# Altium PCB v5-IRarray.pcbdoc
Units mm, origin at the board's own origin, x right, y up, seen from the top; angles counter-clockwise.
Board outline 81.01 x 98.47 mm, 2 copper layers (Top Layer, Bottom Layer); 43 components, 34 nets, 88 pads, 0 vias.
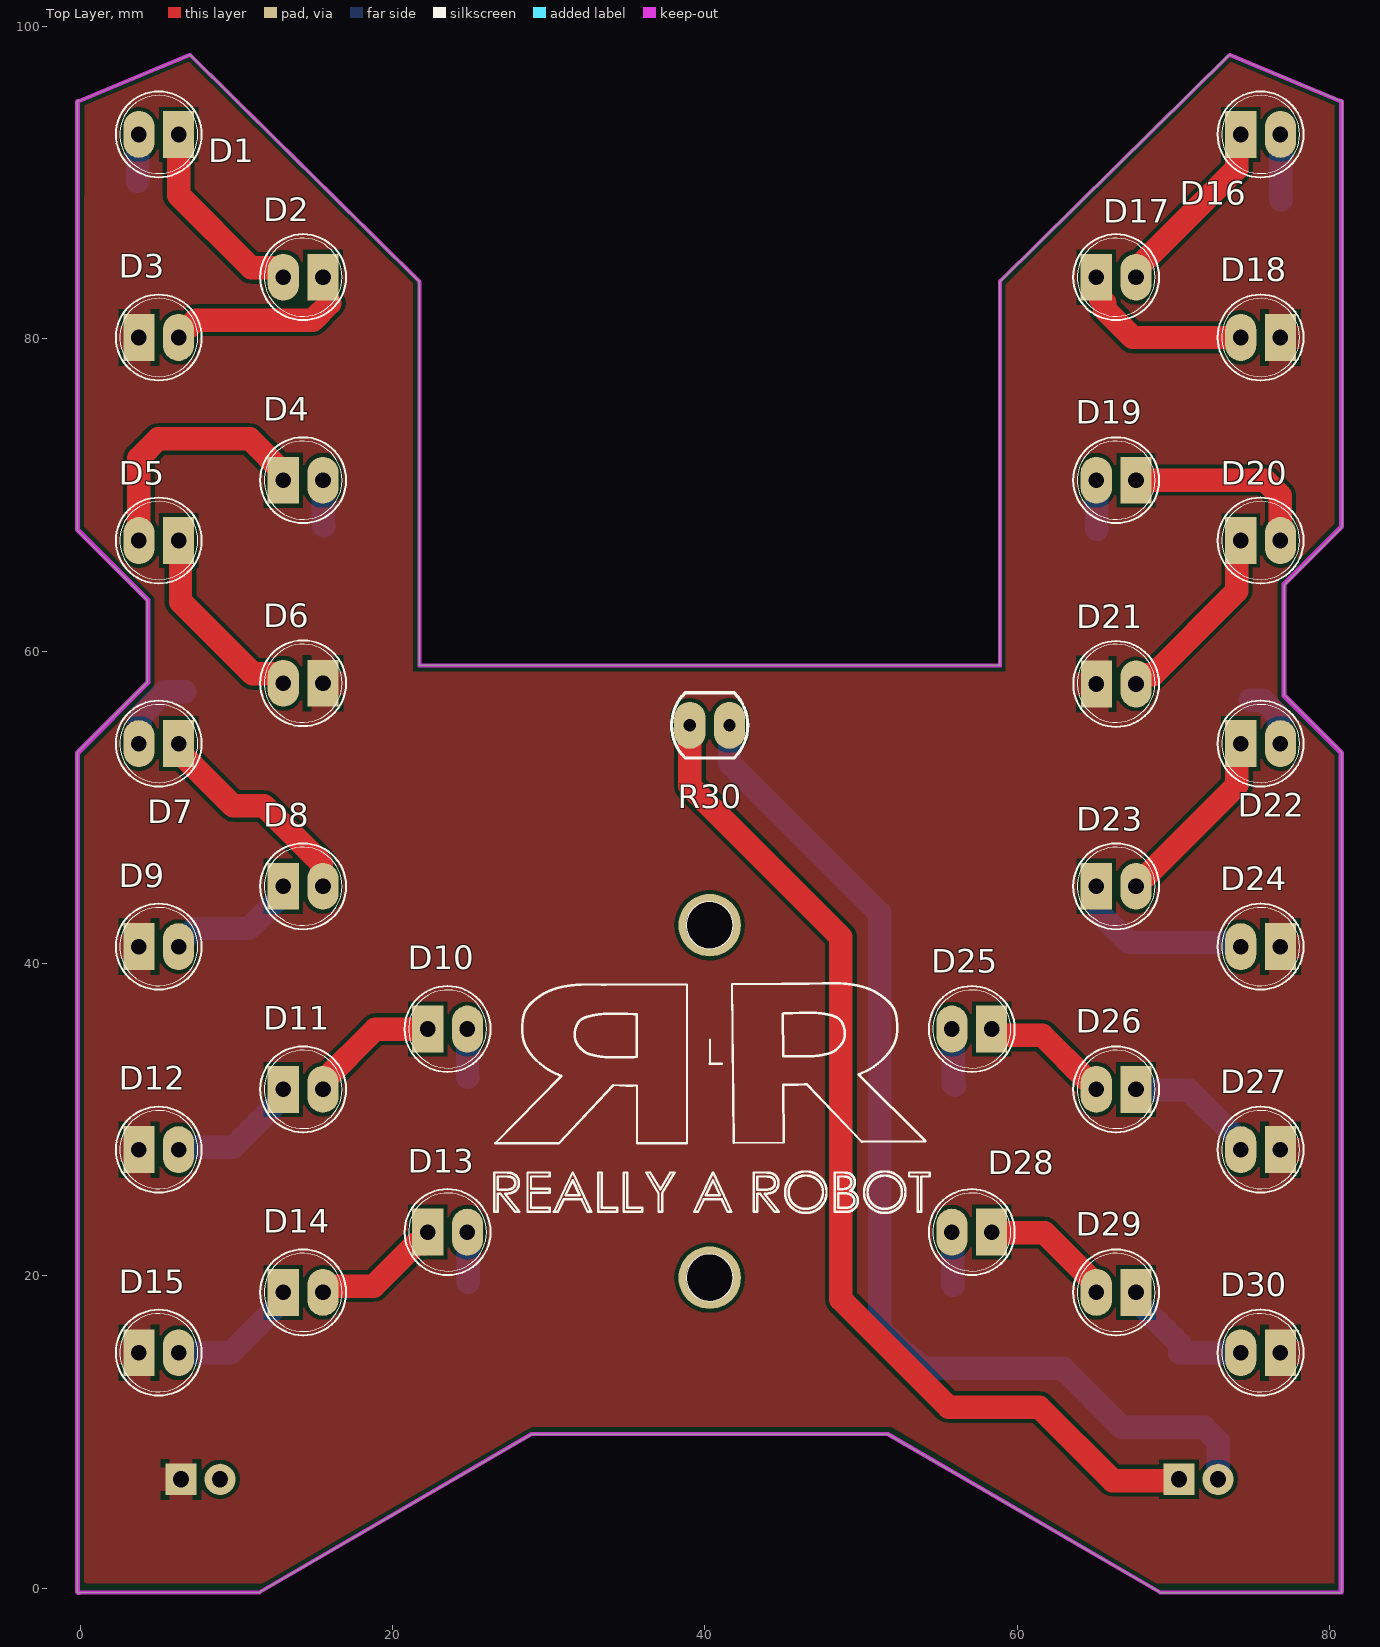
[diagram p0: Top Layer view]
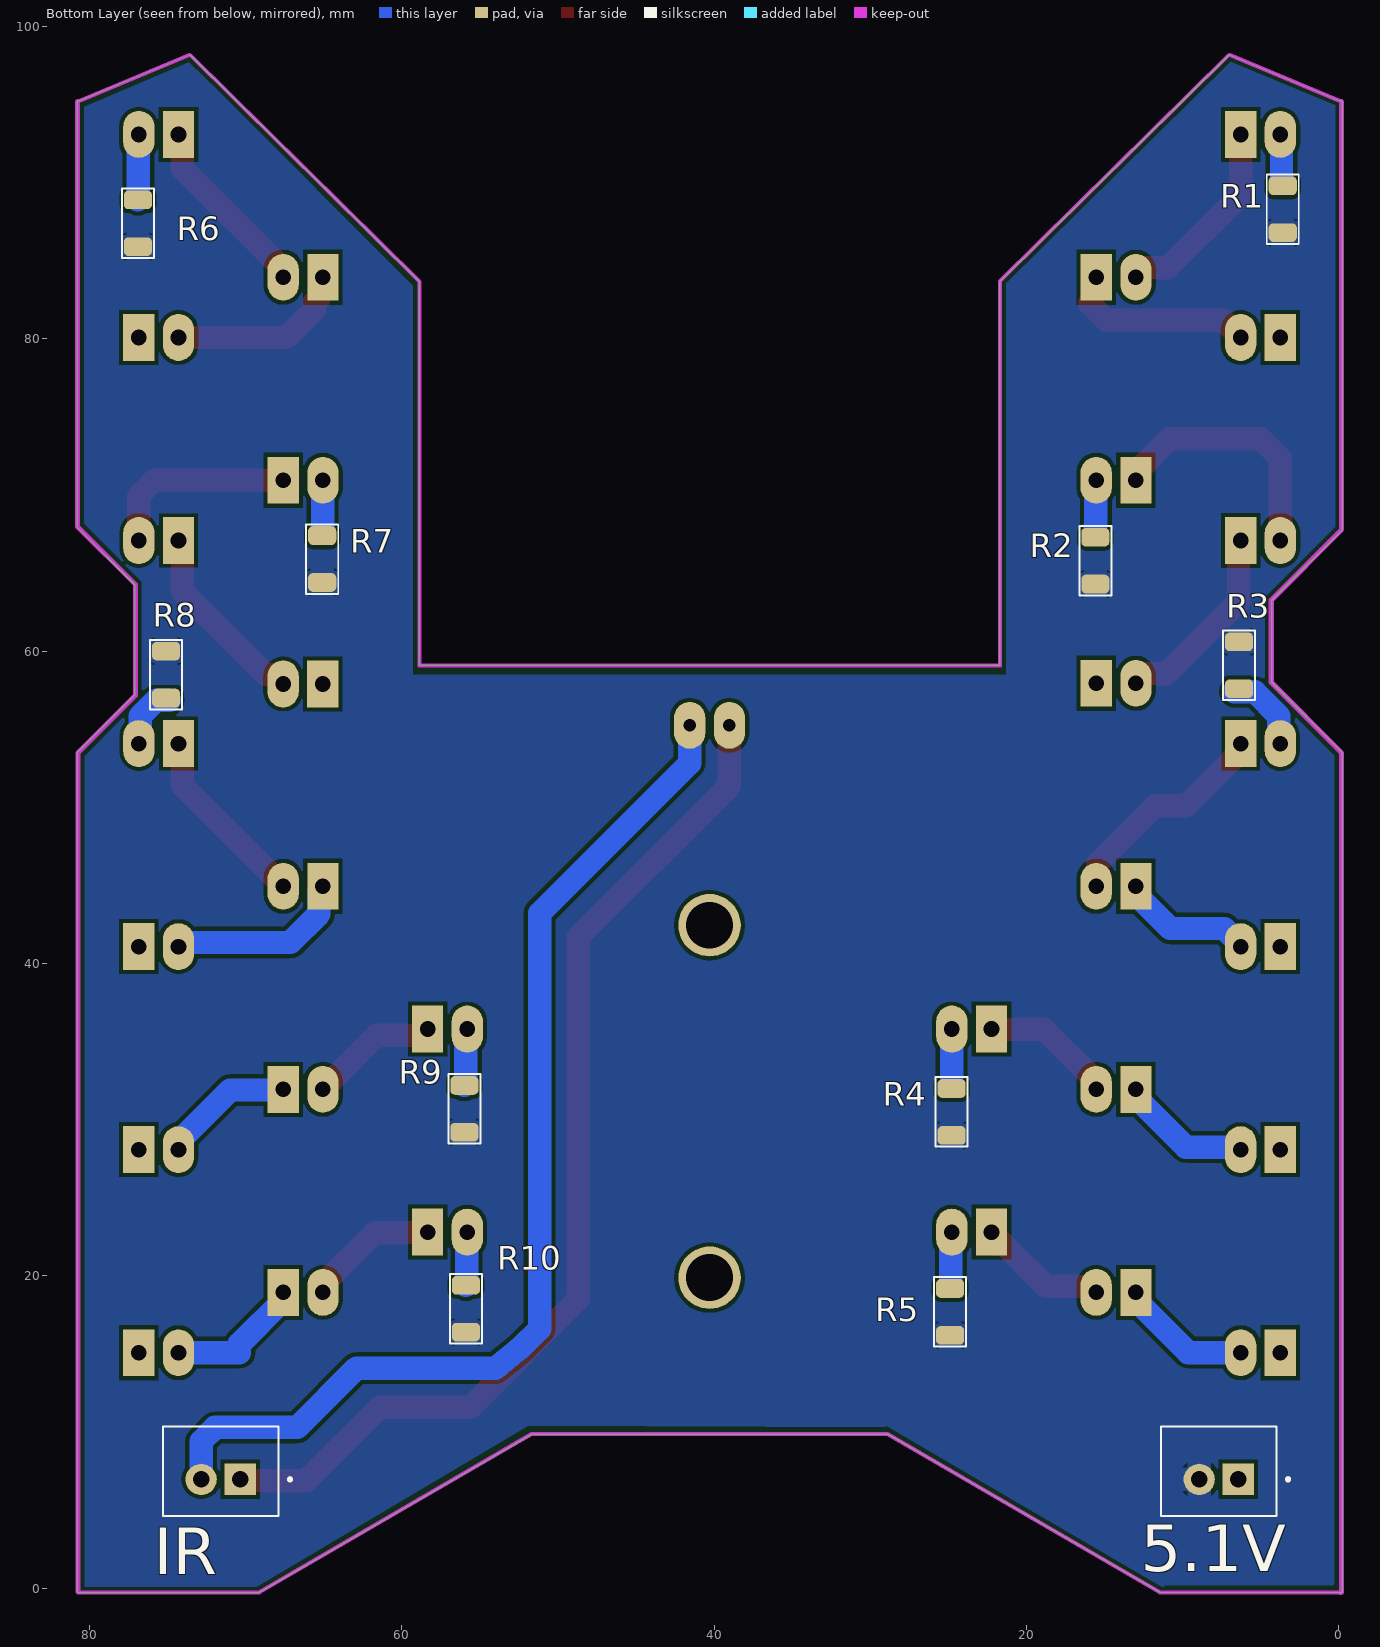
[diagram p1: Bottom Layer view, seen from below]
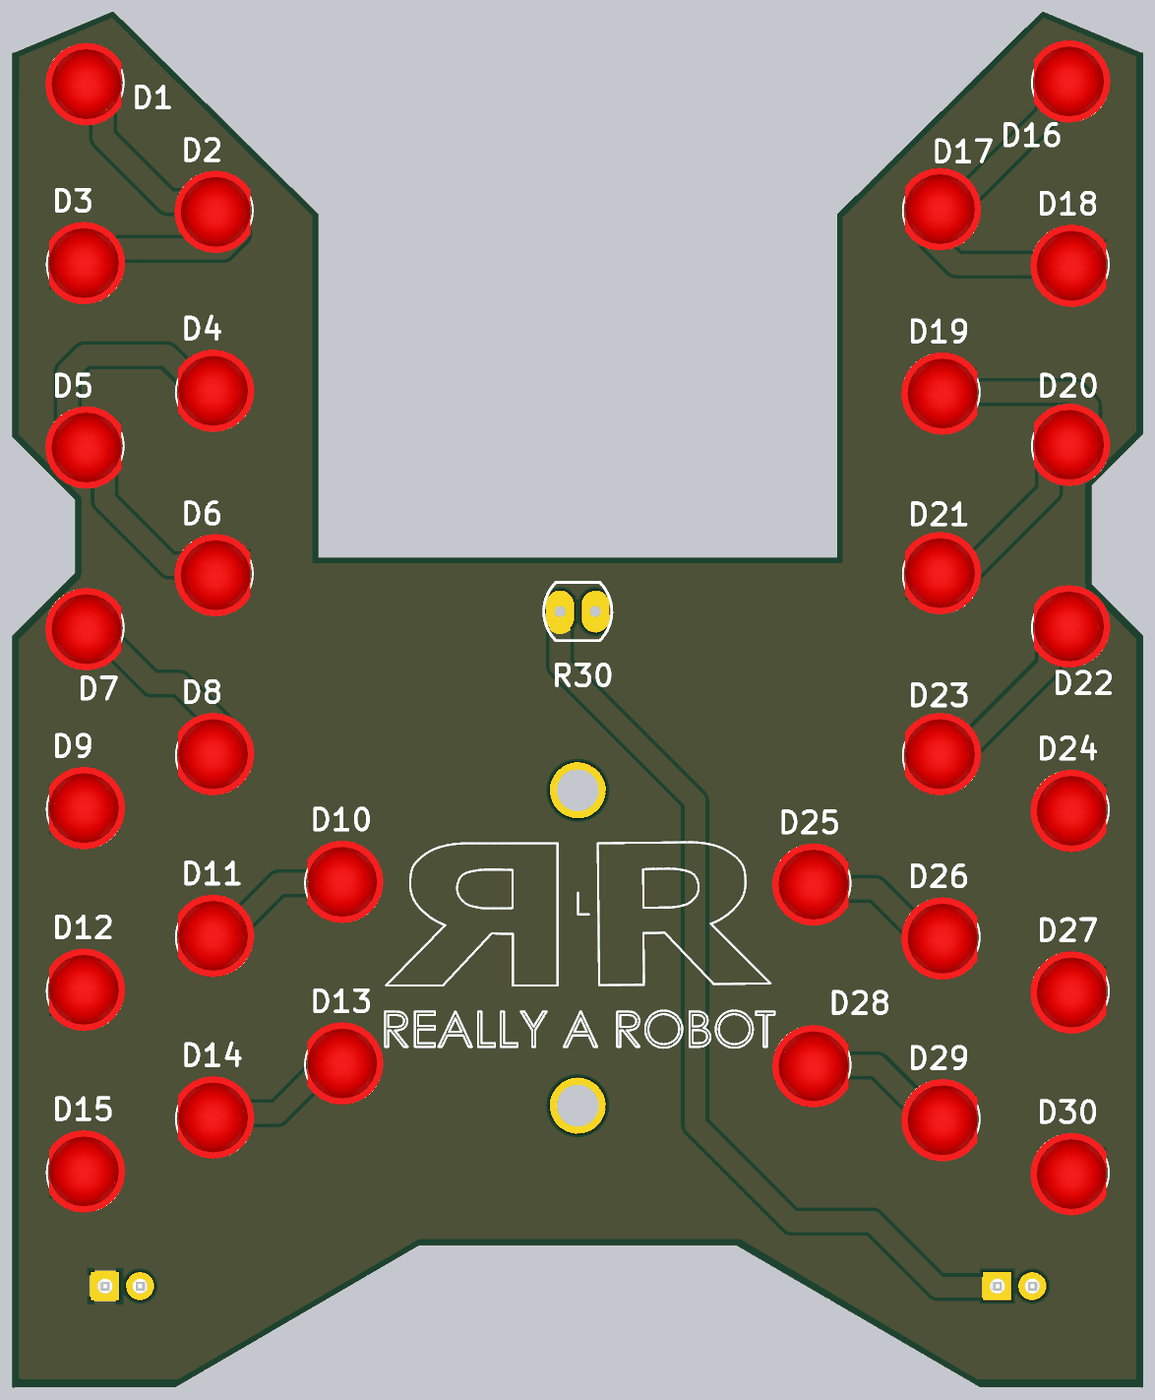
[diagram p2: 3D render of the assembled board from above, using the file's embedded part models]
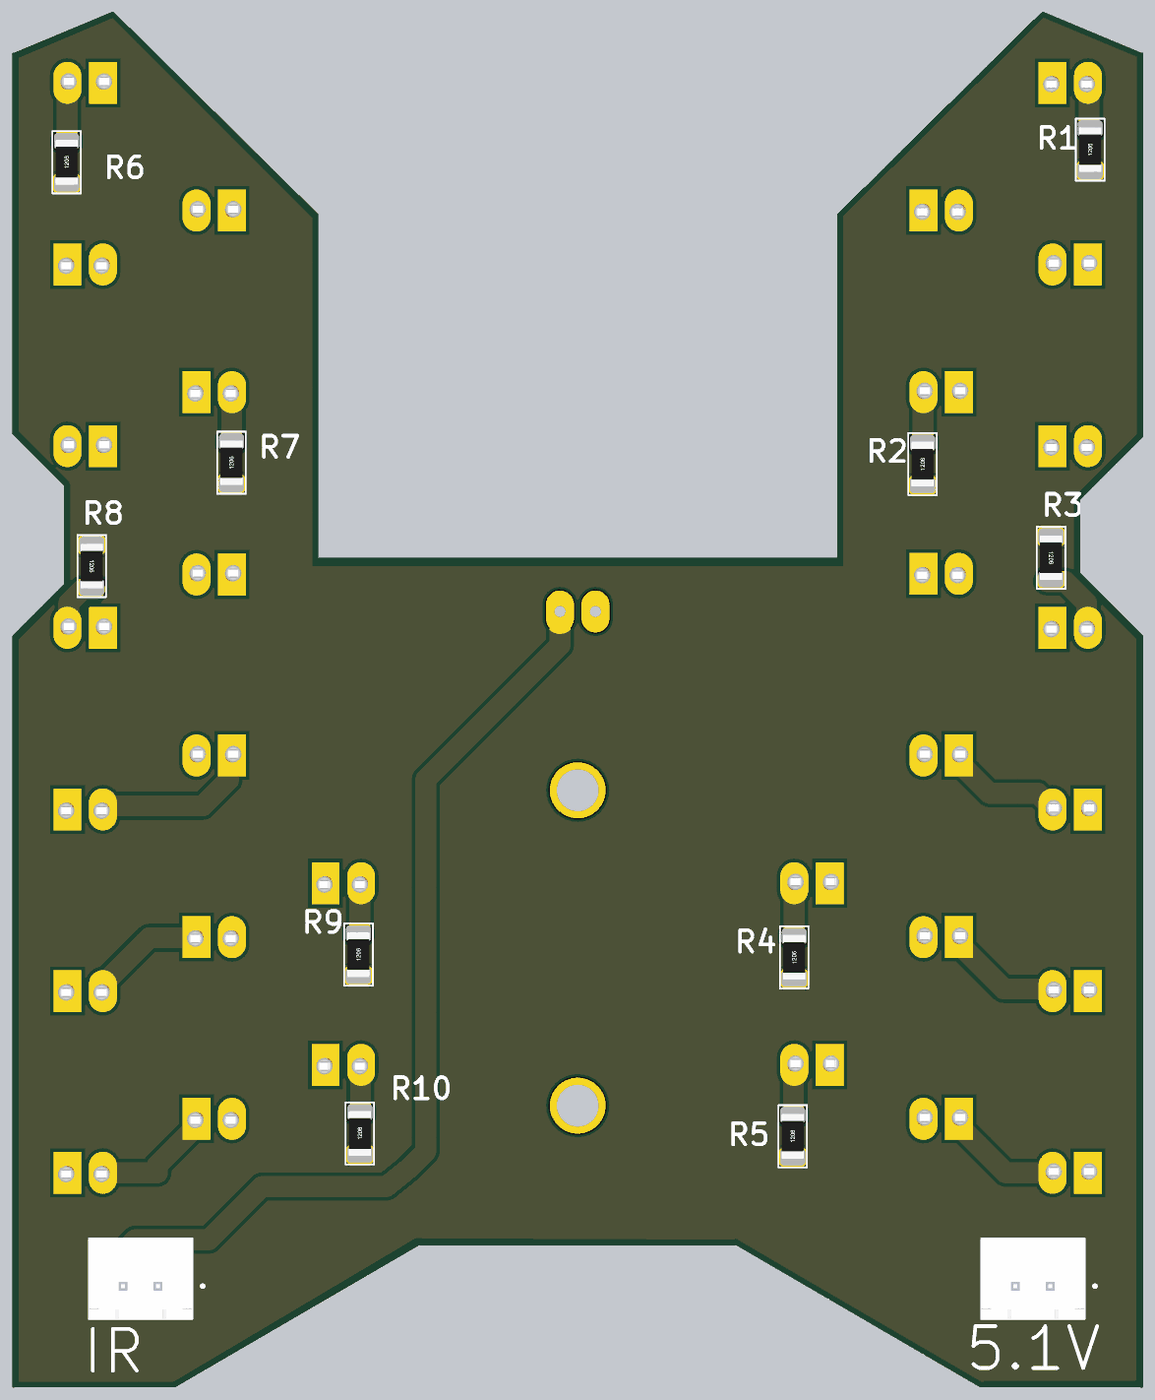
[diagram p3: 3D render of the assembled board from below, using the file's embedded part models]

## Layer stack, top to bottom
Top Solder: solder mask 0.0102, Solder Resist, Dk 3.5
Top Layer: signal copper 0.0356
Dielectric1: dielectric 0.32, FR-4, Dk 4.8
Bottom Layer: signal copper 0.0356
Bottom Solder: solder mask 0.0102, Solder Resist, Dk 3.5

## Board outline
-0.2,-0.2 ccw(c-0.1,-0.2) -0.023,-0.264 11.437,-0.271 11.473,-0.261 28.891,9.871 51.709,9.871 69.127,-0.261 69.163,-0.271 80.628,-0.271 ccw(c80.676,-0.182) 80.776,-0.182 80.776,53.476 80.747,53.547 77.1,57.193 77.1,64.258 80.771,67.929 80.8,68 80.8,95.141 ccw(c80.7,95.141) 80.657,95.232 73.616,98.172 73.538,98.157 58.904,83.692 58.883,83.642 58.883,59.087 21.717,59.087 21.717,83.642 21.696,83.692 7.062,98.157 6.984,98.172 -0.065,95.228 ccw(c-0.107,95.137) -0.207,95.137 -0.207,67.807 -0.178,67.736 4.3,63.258 4.3,58.017 -0.171,53.547 -0.2,53.476

## Design rules (kind name [scope] priority, off if disabled: settings)
Clearance [All] p1: gap=0.25 ignorepadtopadclearanceinfootprint=TRUE
ComponentClearance [All] p1: gap=0.25 collisioncheckmode=3 verticalgap=0.01 showdistances=FALSE
DiffPairsRouting [All] p1: maxlimit=2.54 minlimit=0.127 mostfreqgap=0.254 toplayer_minwidth=0.508 toplayer_maxwidth=2.54 toplayer_prefwidth=0.508 bottomlayer_minwidth=0.508 bottomlayer_maxwidth=2.54 bottomlayer_prefwidth=0.508 maxuncoupledlength=12.7
HoleSize [All] p1: absolutevalues=TRUE maxlimit=4 minlimit=0.3 maxpercent=80.000 minpercent=20.000
MinimumSolderMaskSliver [All] p1: minsoldermaskwidth=0.075
PlaneConnect [All] p1: planeconnectstyle=Relief reliefexpansion=0.254 reliefentries=4 reliefconductorwidth=1.524 reliefairgap=0.508
PolygonConnect [All] p1: connectstyle=Relief reliefconductorwidth=1.524 reliefentries=4 polygonreliefangle="90 Angle" airgapwidth=0.3
RoutingVias [All] p1: holewidth=0.711 width=1.27 viastyle="Through Hole" minholewidth=0.711 minwidth=1.27 maxholewidth=0.711 maxwidth=1.27
SilkToSilkClearance [All] p1: silktosilkclearance=0.1
SilkToSolderMaskClearance [IsPad] p1: minsilkscreentomaskgap=0.1 clearancetoexposedcopper=TRUE
SolderMaskExpansion [All] p1: expansion=0.1
Width Width_PWR [All] p1: maxlimit=5 minlimit=0.3 preferedwidth=0.5
23 further rules are at their usual default settings.

## Components (designator, comment, footprint, x,y, rotation, side; value= is the part's Value field where it differs from the comment)
5.1V "B2B-XH-A(LF)(SN)" JST_B2B-XH-A(LF)(SN) 7.7,7.5 r180 bottom
D1 "SFH4547" SFH45547 5.027,93.086 r180 top
D2 "SFH4547" SFH45547 14.272,83.947 r180 top
D3 "SFH4547" SFH45547 5.027,80.086 r0 top
D4 "SFH4547" SFH45547 14.272,70.947 r0 top
D5 "SFH4547" SFH45547 5.027,67.086 r180 top
D6 "SFH4547" SFH45547 14.272,57.947 r180 top
D7 "SFH4547" SFH45547 5.027,54.086 r180 top
D8 "SFH4547" SFH45547 14.272,44.947 r0 top
D9 "SFH4547" SFH45547 5.027,41.086 r0 top
D10 "SFH4547" SFH45547 23.518,35.808 r0 top
D11 "SFH4547" SFH45547 14.272,31.947 r0 top
D12 "SFH4547" SFH45547 5.027,28.086 r0 top
D13 "SFH4547" SFH45547 23.518,22.808 r0 top
D14 "SFH4547" SFH45547 14.272,18.947 r0 top
D15 "SFH4547" SFH45547 5.027,15.086 r0 top
D16 "SFH4547" SFH45547 75.573,93.086 r0 top
D17 "SFH4547" SFH45547 66.328,83.947 r0 top
D18 "SFH4547" SFH45547 75.573,80.086 r180 top
D19 "SFH4547" SFH45547 66.328,70.947 r180 top
D20 "SFH4547" SFH45547 75.573,67.086 r0 top
D21 "SFH4547" SFH45547 66.33,57.9 r0 top
D22 "SFH4547" SFH45547 75.573,54.086 r0 top
D23 "SFH4547" SFH45547 66.328,44.947 r0 top
D24 "SFH4547" SFH45547 75.573,41.086 r180 top
D25 "SFH4547" SFH45547 57.082,35.808 r180 top
D26 "SFH4547" SFH45547 66.328,31.947 r180 top
D27 "SFH4547" SFH45547 75.573,28.086 r180 top
D28 "SFH4547" SFH45547 57.082,22.808 r180 top
D29 "SFH4547" SFH45547 66.328,18.947 r180 top
D30 "SFH4547" SFH45547 75.573,15.086 r180 top
IR "B2B-XH-A(LF)(SN)" JST_B2B-XH-A(LF)(SN) 71.6,7.5 r180 bottom
R1 "21 5% 1/4W" R1206 3.6,88.3 r90 bottom
R2 "21 5% 1/4W" R1206 15.6,65.8 r90 bottom
R3 "21 5% 1/4W" R1206 6.4,59.1 r270 bottom
R4 "21 5% 1/4W" R1206 24.8,30.5 r90 bottom
R5 "21 5% 1/4W" R1206 24.9,17.7 r90 bottom
R6 "21 5% 1/4W" R1206 76.9,87.4 r90 bottom
R7 "21 5% 1/4W" R1206 65.1,65.9 r90 bottom
R8 "21 5% 1/4W" R1206 75.1,58.5 r270 bottom
R9 "21 5% 1/4W" R1206 56,30.7 r90 bottom
R10 "21 5% 1/4W" R1206 55.9,17.9 r90 bottom
R30 "VT90N1" EXCE-VT90N1 40.3,55.252 r0 top

## Footprints (in the part's own frame and the unit in brackets; to place one, negate y for a bottom-side part, rotate by r counter-clockwise, add the part's x,y. Pads: shape width x height; smd on the part's side, far side on the other; paste and mask are expansions set on the pad)
EXCE-VT90N1 [mm] "THD, 2-Leads, Body Width 4.17mm (Max), Height 2.29mm"
  oval 2x3 hole 0.8: 1(-1.27,0) 2(1.27,0)
  silkscreen extent -2.44,-2.08 2.44,2.08, body extent -2.44,-2.09 2.44,2.09, height 2.29
JST_B2B-XH-A(LF)(SN) [mm]
  rect 2x2 hole 1.05: 1(1.25,-0.525)
  round 2 hole 1.05: 2(-1.25,-0.525)
  silkscreen extent -3.7,-2.88 4.54,2.88, body extent -3.7,-2.88 3.7,2.88, height 7
R1206 [mm]
  rrect50% 1.2x1.8 smd: 1(-1.5,0) 2(1.5,0)
  silkscreen extent -2.22,-1.02 2.22,1.02, body extent -1.6,-0.8 1.6,0.8, height 0.6
SFH45547 [mm]
  oval 2x3 hole 1 mask+0: A(1.27,0)
  rect 2x3 hole 1 mask+0: C(-1.27,0)
  silkscreen extent -2.75,-2.75 2.75,2.75, body extent -2.59,-2.85 2.84,3.05, height 8.58

## Part data
5.1V IR: "Connector Header Through Hole 2 position 0.098 (2.50mm)", Package=None, Check_prices=https://www.snapeda.com/parts/B2B-XH-A(LF)(SN)/JST+Sales+America+Inc./view-part/?ref=eda, MF="JST Sales America Inc.", MP=B2B-XH-A(LF)(SN), SnapEDA_Link=https://www.snapeda.com/parts/B2B-XH-A(LF)(SN)/JST+Sales+America+Inc./view-part/?ref=snap
R1 R2 R3 R4 R5 R6 R7 R8 R9 R10: library part R-1206, "SMD 1206 0.25W 5% 200V", Type=RES
R30: library part CMP-2000-07406-1, "Photoconductive Resistor, 200 kOhm, 100 V, 80 mW, -40 to 75 degC, 2-Pin THD, RoHS", Dark Resistance=200kohm, Manufacturer="Excelitas Technology", Operating Temperature Max=75癈, Operating Temperature Min=-40癈, Package Description="2-Pin Through Hole Device, Body Width 4.17 mm (Max), Height 2.29 mm", Power Rating=80mW, Resistance @ Lux=12kohm, Resistor Case Style=-, Voltage Rating=100V, Datasheet URL=http://datasheet.octopart.com/VT90N1-Excelitas-datasheet-10388451.pdf, Datasheet Version=09/2006, Manufacturer URL=http://www.excelitas.com/Pages/Index.aspx, Mounting Technology=ThroughHole, Package Reference=VT90N1, Packaging=Each, Product Range=-, SVHC=Cadmiumchloride(15-Jun-2015)

## Free pads (board coordinates)
  round 4 hole 3: 50(40.3,42.456) 51(40.3,19.889)

## Nets (pads, with @x,y where several pads share a name; then routed paths per layer and width w, separated by ;. In a path a pad name is that pad's centre, name@x,y a point inside that pad or via, vN(x,y) a via of type N, cw(c..) or ccw(c..) an arc to the next point about the centre after c; other vN are vias at no path point)
5V: 5.1V.2 R1.1 R2.1 R3.1 R4.1 R5.1 R6.1 R7.1 R8.1 R9.1 R10.1
A1-LDR: IR.1 R30.1 | length 67.3
  Top Layer w1.5: R30.1 39.03,51.37 48.7,41.7 48.7,18.5 55.6,11.6 61.4,11.6 66.1,6.9 IR.1@70.4,6.9
GND: 5.1V.1 D3.C D6.C D9.C D12.C D15.C D18.C D21.C D24.C D27.C D30.C
NetD1_A: D1.A R1.2 | length 3
  Bottom Layer w1.5: R1.2@3.678,90.1 3.678,93.007 D1.A
NetD1_C: D1.C D2.A | length 13
  Top Layer w1.5: D1.C 6.297,89.203 10.957,84.543 12.771,84.543 13.002,84.312 D2.A
NetD2_C: D2.C D3.A | length 10.7
  Top Layer w1.5: D3.A 6.297,80.315 6.759,80.777 6.988,80.777 7.411,81.2 10.2,81.2 14.9,81.2 15.982,82.282
NetD4_A: D4.A R2.2 | length 2.9
  Bottom Layer w1.5: D4.A 15.571,70.918 15.571,68.054 15.6,68.025
NetD4_C: D4.C D5.A | length 16.4
  Top Layer w1.5: D5.A 3.757,72.357 5,73.6 10.85,73.6 13.002,71.447 D4.C
NetD5_C: D5.C D6.A | length 12.9
  Top Layer w1.5: D5.C 6.421,66.961 6.421,63.179 11.057,58.543 12.771,58.543 13.002,58.312 D6.A
NetD7_A: D7.A R3.2 | length 5.3
  Bottom Layer w1.5: D7.A 3.852,54.181 3.852,55.852 5.4,57.4 R3.2@6.7,57.4
NetD7_C: D7.C D8.A | length 14.1
  Top Layer w1.5: D7.C 6.297,53.586 9.784,50.099 11.765,50.099 15.447,46.417 15.447,45.043 D8.A
NetD8_C: D8.C D9.A | length 8.1
  Bottom Layer w1.5: D9.A@6.6,41.5 7.345,42.245 10.8,42.245 13.002,44.447 D8.C
NetD10_A: D10.A R4.2 | length 3.1
  Bottom Layer w1.5: D10.A 24.794,35.802 24.794,32.731 24.8,32.725
NetD10_C: D10.C D11.A | length 8.6
  Top Layer w1.5: D11.A 15.542,32.447 18.895,35.8 22.24,35.8 D10.C
NetD11_C: D11.C D12.A | length 8.6
  Bottom Layer w1.5: D12.A 6.456,28.245 9.8,28.245 13.002,31.447 D11.C
NetD13_A: D13.A R5.2 | length 3.2
  Bottom Layer w1.5: D13.A 24.844,22.752 R5.2@24.844,19.6
NetD13_C: D13.C D14.A | length 8.7
  Top Layer w1.5: D14.A 15.542,19.122 15.773,19.353 18.792,19.353 21.498,22.058 21.998,22.058 22.248,22.308 D13.C
NetD14_C: D14.C D15.A | length 8.6
  Bottom Layer w1.5: D15.A 9.641,15.086 13.002,18.447 D14.C
NetD16_A: D16.A R6.2 | length 4.2
  Bottom Layer w1.5: D16.A 76.872,93.057 76.872,88.928 R6.2
NetD16_C: D16.C D17.A | length 11.9
  Top Layer w1.5: D17.A 67.598,84.447 74.053,90.903 74.053,92.836 D16.C
NetD17_C: D17.C D18.A | length 11.7
  Top Layer w1.5: D17.C 65.058,83.447 65.308,83.197 65.308,82.608 65.598,82.318 65.598,81.879 67.39,80.086 D18.A
NetD19_A: D19.A R7.2 | length 3.2
  Bottom Layer w1.5: D19.A 65.079,70.926 65.079,67.821 R7.2@65.1,67.8
NetD19_C: D19.C D20.A | length 12.5
  Top Layer w1.5: D19.C 75.853,70.947 76.843,69.957 D20.A
NetD20_C: D20.C D21.A | length 12.5
  Top Layer w1.5: D21.A 67.6,58.265 67.831,58.496 68.696,58.496 74.053,63.853 74.053,66.836 D20.C
NetD22_A: D22.A R8.2 | length 4.1
  Bottom Layer w1.5: R8.2@74.9,56.852 75.743,56.852 76.748,55.848 76.748,54.817 76.843,54.721 D22.A
NetD22_C: D22.C D23.A | length 12.1
  Top Layer w1.5: D23.A 67.598,45.312 67.829,45.543 68.193,45.543 74.053,51.403 74.053,53.836 D22.C
NetD23_C: D23.C D24.A | length 11.8
  Bottom Layer w1.5: D23.C 65.308,44.697 65.308,43.179 67.14,41.347 74.072,41.347 74.303,41.116 D24.A
NetD25_A: D25.A R9.2 | length 3.7
  Bottom Layer w1.5: D25.A 55.906,35.714 55.906,32.294 R9.2
NetD25_C: D25.C D26.A | length 8.6
  Top Layer w1.5: D25.C 58.352,35.653 58.602,35.403 61.602,35.403 64.462,32.543 64.827,32.543 65.058,32.312 D26.A
NetD26_C: D26.C D27.A | length 8.6
  Bottom Layer w1.5: D26.C 67.638,31.906 70.983,31.906 74.303,28.586 D27.A
NetD28_A: D28.A R10.2 | length 3.4
  Bottom Layer w1.5: D28.A 55.856,22.764 55.856,19.444 R10.2
NetD28_C: D28.C D29.A | length 8.6
  Top Layer w1.5: D28.C 58.393,22.768 61.737,22.768 65.058,19.447 D29.A
NetD29_C: D29.C D30.A | length 8.9
  Bottom Layer w1.5: D29.C 67.598,18.447 70.4,15.645 70.4,15.086 D30.A
NetIR_2: IR.2 R30.2 | length 69.7
  Bottom Layer w1.5: R30.2 41.57,52.83 51.18,43.22 51.18,16.62 52.421,15.38 52.483,15.33 54.006,14.1 62.9,14.1 66.7,10.3 71.971,10.3 72.85,9.421 IR.2@72.85,6.9

## Polygon pours and split planes (outlines as drawn)
GND on Top Layer "NONET_L-01_P-001" (solid, pour order 1): 0.1,0.5 0.1,53.1 4.7,57.7 4.7,63.5 0.2,68 0.286,94.777 0.286,95 0.225,94.939 7.062,97.8 21.3,83.562 21.3,58.7 59.27,58.7 59.206,83.39 73.616,97.8 80.3,95 80.3,68.148 76.7,64.548 76.7,56.9 80.3,53.3 80.3,0.314 68.877,0.314 51.932,10.35 28.972,10.35 11.738,0.314 0.286,0.314
5V on Bottom Layer "NONET_L-01_P-001" (solid, pour order 0): 0.2,0.2 0.3,0.3 0.3,53.3 4.7,57.7 4.7,63.5 0.2,68 0.2,94.8 0.2,94.963 7.062,97.8 21.3,83.562 21.3,83.2 21.3,58.5 59.3,58.5 59.3,83.4 73.616,97.716 80.5,94.8 80.5,94.7 80.5,68.2 76.7,64.4 76.7,56.9 80.4,53.2 80.4,0.1 69.3,0.1 51.917,10.4 29.1,10.3 29,10.4 11.2,-0.033 11.2,0.2

## Keep-outs
Keep-Out Layer:
  lines w0.127: -0.107,-0.2 11.437,-0.207 11.441,-0.206 28.873,9.935 51.727,9.935 69.159,-0.206 69.163,-0.207 80.7,-0.207 80.707,-0.2 ; -0.107,95.137 -0.102,95.143 7.009,98.113 7.017,98.112 21.652,83.647 21.654,83.642 21.654,59.023 58.946,59.023 58.946,83.642 58.948,83.647 73.583,98.112 73.591,98.113 80.702,95.143 80.707,95.137
  lines w0.2: -0.107,95.137 -0.107,67.807 4.4,63.3 4.4,57.976 -0.1,53.476 -0.1,-0.2 ; 80.676,-0.182 80.676,53.476 77,57.151 77,64.3 80.7,68 80.7,95.141
  lines w0.254: -0.207,67.807 -0.178,67.736 4.3,63.258 4.3,58.017 -0.171,53.547 -0.2,53.476 -0.2,-0.2 ccw(c-0.1,-0.2) -0.023,-0.264 11.437,-0.271 11.473,-0.261 28.891,9.871 51.709,9.871 69.127,-0.261 69.163,-0.271 80.628,-0.271 ccw(c80.676,-0.182) 80.776,-0.182 80.776,53.476 80.747,53.547 77.1,57.193 77.1,64.258 80.771,67.929 80.8,68 80.8,95.141 ccw(c80.7,95.141) 80.657,95.232 73.616,98.172 73.538,98.157 58.904,83.692 58.883,83.642 58.883,59.087 21.717,59.087 21.717,83.642 21.696,83.692 7.062,98.157 6.984,98.172 -0.065,95.228 ccw(c-0.107,95.137) -0.207,95.137 -0.207,67.807

## Silkscreen, mask and mechanical layers (free items; w line width, h text height)
Top Overlay:
  drawing of 18877 lines, arcs and shapes, not listed
Drill Drawing:
  text "-   +" at 8.1,96.6 h4 r180
  text "-   +" at 72.9,94.4 h4
  text "-   +" at 16.8,87.9 h4 r180
  text "-   +" at 63.5,86.2 h4
  text "-   +" at 78.3,84.1 h4 r180
  text "-   +" at 2,82.6 h4
  text "-   +" at 17.4,75.1 h4 r180
  text "-   +" at 68.8,75.1 h4 r180
  text "-   +" at 7.8,71.1 h4 r180
  text "-   +" at 72.7,69.5 h4
  text "-   +" at 17.2,62.2 h4 r180
  text "-   +" at 63.4,60.7 h4
  text "-   +" at 8.2,57.8 h4 r180
  text "-   +" at 72.7,56.9 h4
  text "-   +" at 63.7,47.4 h4
  text "-   +" at 11.6,47.1 h4
  text "-   +" at 78.3,45.2 h4 r180
  text "-   +" at 2.3,43.8 h4
  text "-   +" at 26.1,40.5 h4 r180
  text "-   +" at 59.4,39.9 h4 r180
  text "-   +" at 11.2,34.2 h4
  text "-   +" at 63.8,33.8 h4
  text "-   +" at 2,30.1 h4
  text "-   +" at 72.7,30.1 h4
  text "-   +" at 59.8,26.9 h4 r180
  text "-   +" at 20.6,25.2 h4
  text "-   +" at 63.4,21.4 h4
  text "-   +" at 11.3,21.2 h4
  text "-   +" at 2.4,17.6 h4
  text "-   +" at 73,17.4 h4